# Altium PCB PCB1.PcbDoc (part 2 of 3)
Units mm, origin at the board's own origin, x right, y up, seen from the top; angles counter-clockwise.
Board outline 232.8 x 105.73 mm, 4 copper layers (Top Layer, Power Layer, GND Layer, Bottom Layer), stack 1.714 mm thick; 607 components, 390 nets, 1962 pads, 57 vias.
Unrouted connection lines stored in the file: 1386.
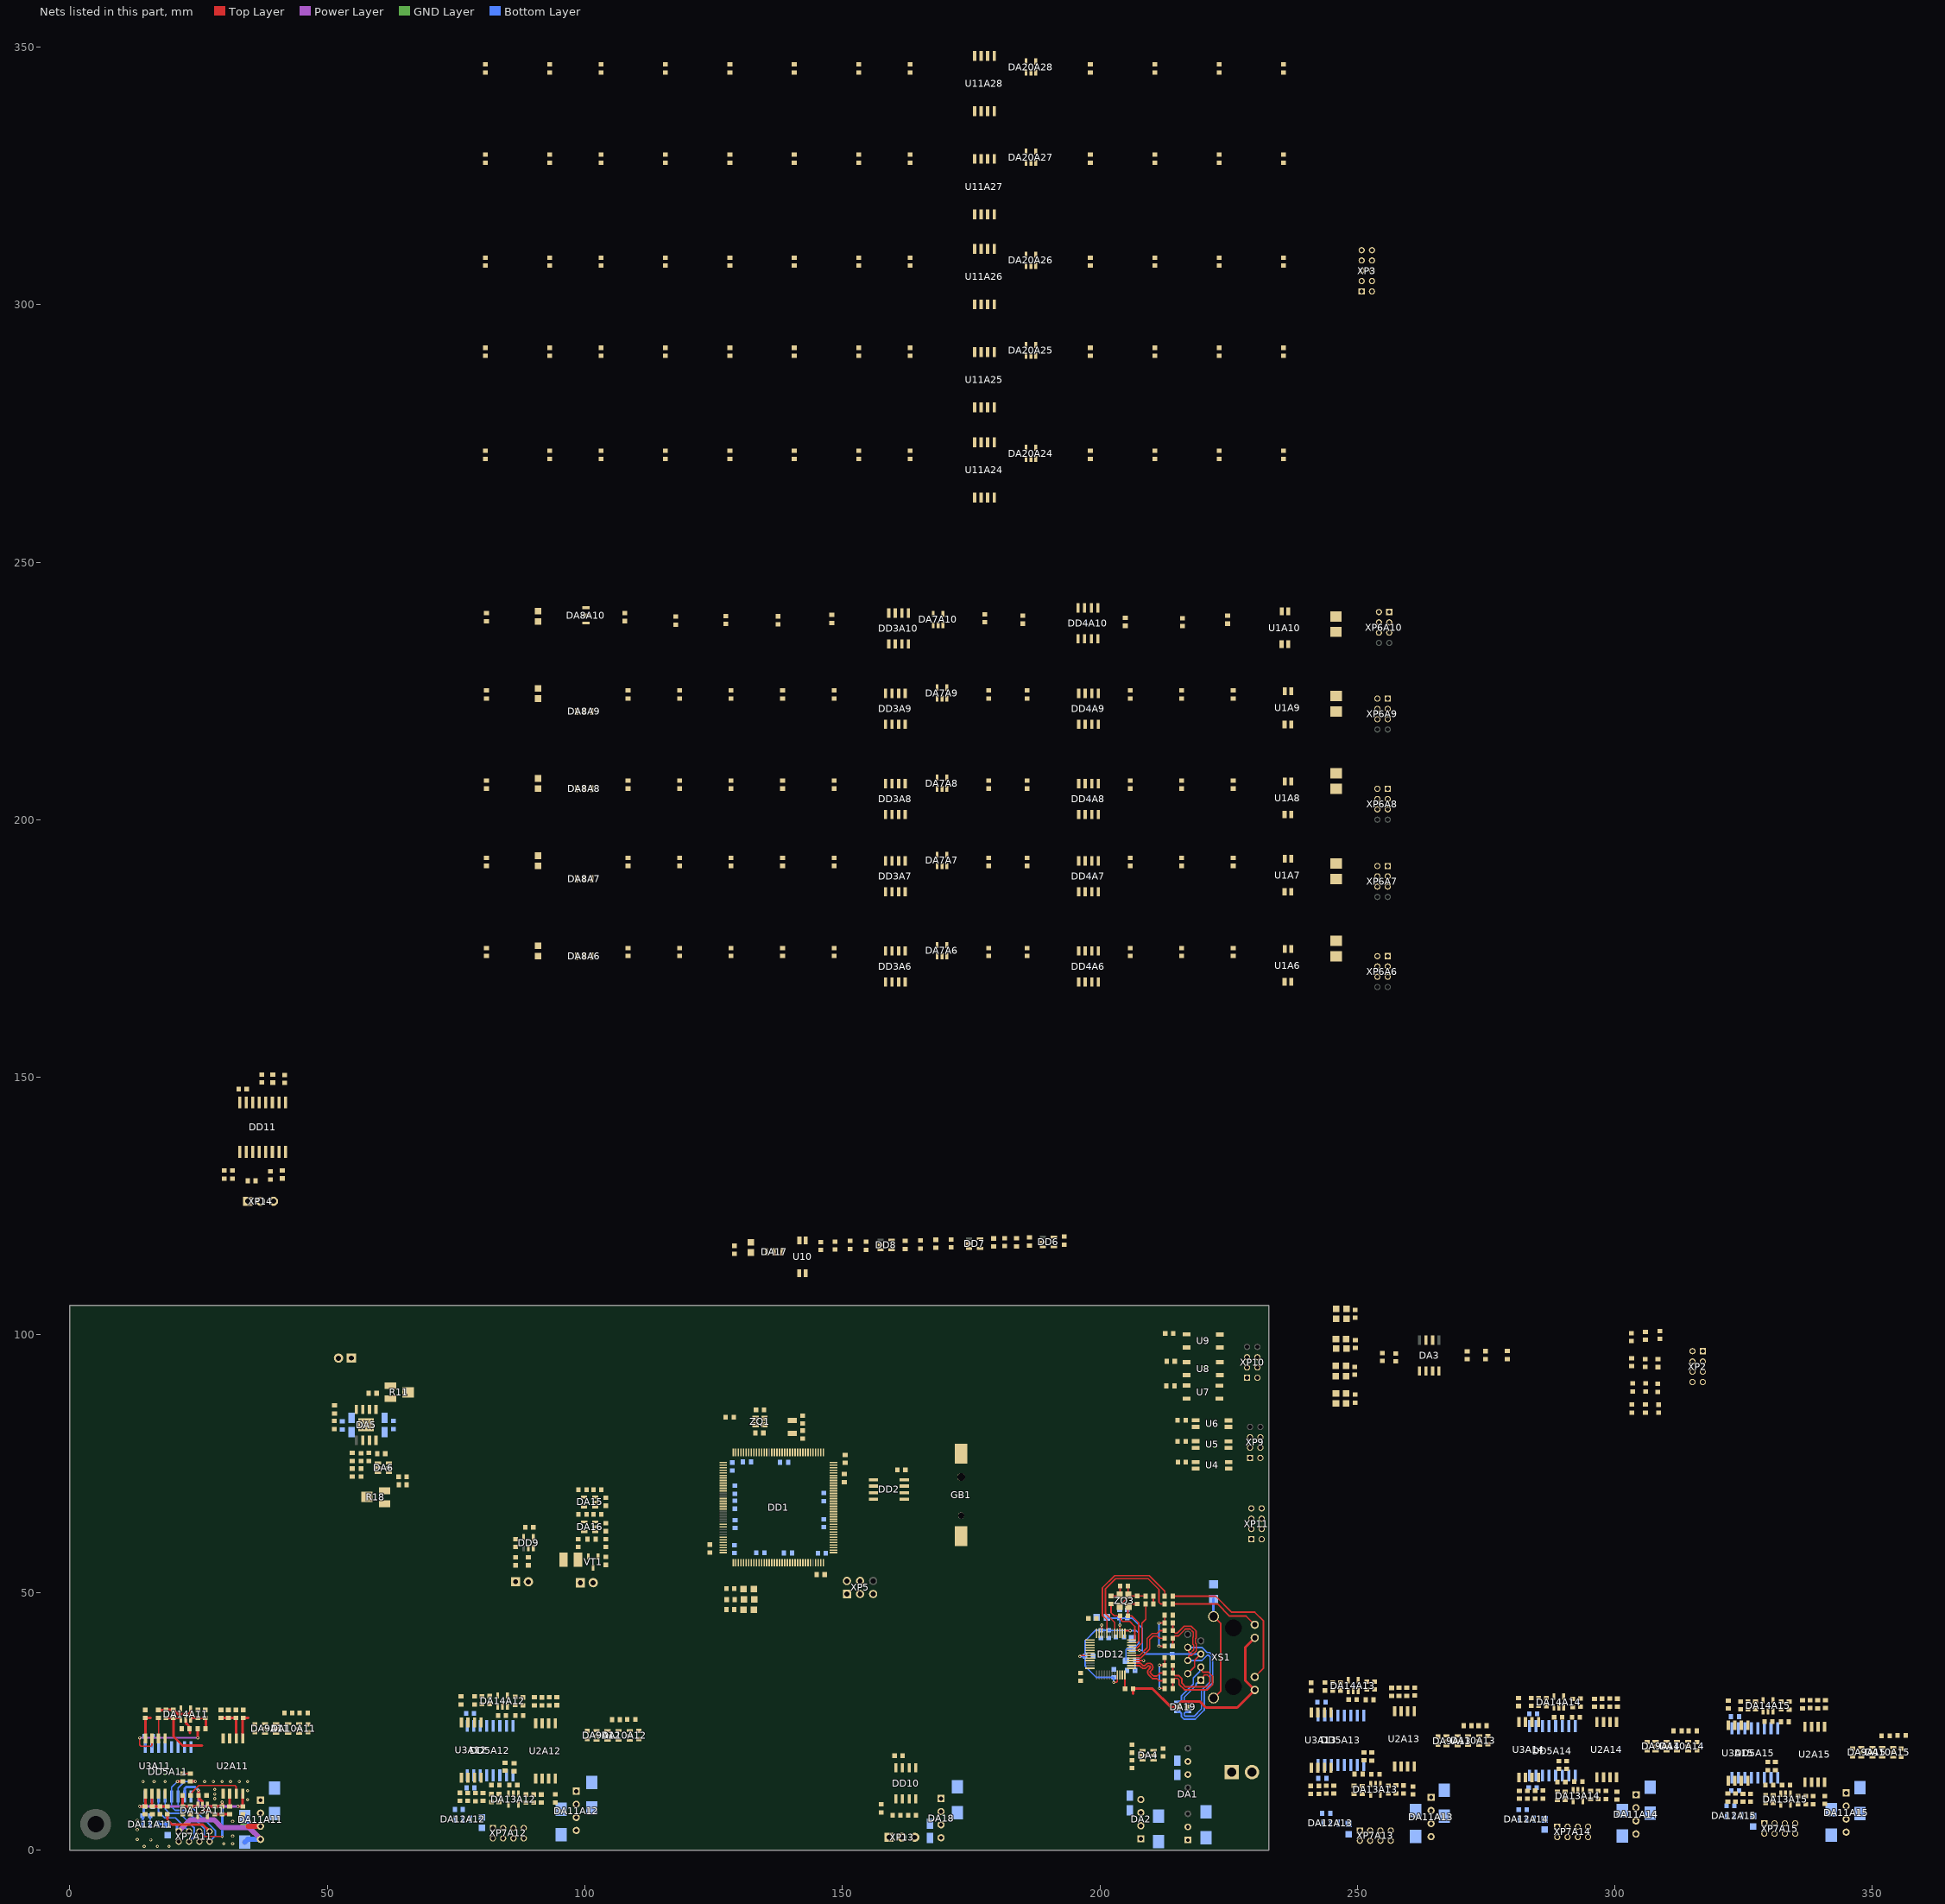
[diagram p4: the nets of this part, all layers, seen from the top]

## Footprints (in the part's own frame and the unit in brackets; to place one, negate y for a bottom-side part, rotate by r counter-clockwise, add the part's x,y. Pads: shape width x height; smd on the part's side, far side on the other; paste and mask are expansions set on the pad) (continued)
CAP_B [mm]
  rect 2x2.2 smd: 1(0,0) 2(3,0)
  silkscreen extent -2.15,-1.4 4.25,1.4, body extent -0.25,-1.4 3.25,1.4, height 1.9
CAP_C [mm]
  rect 2.6x2.2 smd: 1(0,0) 2(5,0)
  silkscreen extent -2.4,-1.58 6.53,1.6, body extent -0.5,-1.6 5.5,1.6, height 2.5
DS1092-12-N8S [mm]
  rect 3.9x2.4 smd: 1(0,0) 2(16,0)
  round 1.2 hole 1.2: 1(4,0)
  round 1.5 hole 1.5: 1(11.5,0)
  silkscreen extent 0,-7.37 17.4,7.37, body extent -1.4,-7.37 17.4,7.37, height 4.23
IND_0805 [mm]
  rect 1.27x1.27 smd: 1(0,0) 2(2,0)
  silkscreen extent -0.85,-0.85 2.85,0.85, body extent 0,-0.62 2,0.62, height 0.85
LED_0805 [mm]
  rect 1.27x1.27 smd: 1(0,0) 2(2,0)
  silkscreen extent -0.85,-0.85 3.22,0.85, body extent -0.03,-0.46 2.03,0.45, height 0.85
LPJD0012BENL [mm]
  rect 1.4x1.4 hole 0.9: 1(0,0)
  round 1.4 hole 0.9: 2(1.27,2.54) 3(2.54,0) 4(3.81,2.54) 5(5.08,0) 6(6.35,2.54) 7(7.62,0) 8(8.89,2.54)
  round 1.6 hole 1.02: 9(-1.907,-10.46) 10(0.633,-10.46) 11(8.223,-10.46) 12(10.763,-10.46)
  round 2.1 hole 1.6: 13(-3.475,-2.46) 14(12.365,-2.46)
  round 0 hole 3.25 unplated: ""(-1.27,-6.35) ""(10.16,-6.35)
  silkscreen extent -3.57,-13.08 12.42,3.62, body extent -3.57,-13.08 12.42,3.63, height 17.4
LQFP-48 [mm]
  rect 1.8x0.3 smd: 1(0,0) 2(0,-0.5) 3(0,-1) 4(0,-1.5) 5(0,-2) 6(0,-2.5) 7(0,-3) 8(0,-3.5) 9(0,-4) 10(0,-4.5) 11(0,-5) 12(0,-5.5) 25(8.1,-5.5) 26(8.1,-5) 27(8.1,-4.5) 28(8.1,-4) 29(8.1,-3.5) 30(8.1,-3) 31(8.1,-2.5) 32(8.1,-2) 33(8.1,-1.5) 34(8.1,-1) 35(8.1,-0.5) 36(8.1,0)
  rect 0.3x1.8 smd: 13(1.3,-6.8) 14(1.8,-6.8) 15(2.3,-6.8) 16(2.8,-6.8) 17(3.3,-6.8) 18(3.8,-6.8) 19(4.3,-6.8) 20(4.8,-6.8) 21(5.3,-6.8) 22(5.8,-6.8) 23(6.3,-6.8) 24(6.8,-6.8) 37(6.8,1.3) 38(6.3,1.3) 39(5.8,1.3) 40(5.3,1.3) 41(4.8,1.3) 42(4.3,1.3) 43(3.8,1.3) 44(3.3,1.3) 45(2.8,1.3) 46(2.3,1.3) 47(1.8,1.3) 48(1.3,1.3)
  silkscreen extent -0.13,-5.6 6.9,0.92, body extent -0.45,-7.25 8.55,1.75, height 1.6
LQFP-144 [mm]
  rect 1.45x0.3 smd: 1(0,0) 2(0,-0.5) 3(0,-1) 4(0,-1.5) 5(0,-2) 6(0,-2.5) 7(0,-3) 8(0,-3.5) 9(0,-4) 10(0,-4.5) 11(0,-5) 12(0,-5.5) 13(0,-6) 14(0,-6.5) 15(0,-7) 16(0,-7.5) 17(0,-8) 18(0,-8.5) 19(0,-9) 20(0,-9.5) 21(0,-10) 22(0,-10.5) 23(0,-11) 24(0,-11.5) 25(0,-12) 26(0,-12.5) 27(0,-13) 28(0,-13.5) 29(0,-14) 30(0,-14.5) 31(0,-15) 32(0,-15.5) 33(0,-16) 34(0,-16.5) 35(0,-17) 36(0,-17.5) 73(21.45,-17.5) 74(21.45,-17) 75(21.45,-16.5) 76(21.45,-16) 77(21.45,-15.5) 78(21.45,-15) 79(21.45,-14.5) 80(21.45,-14) 81(21.45,-13.5) 82(21.45,-13) 83(21.45,-12.5) 84(21.45,-12) 85(21.45,-11.5) 86(21.45,-11) 87(21.45,-10.5) 88(21.45,-10) 89(21.45,-9.5) 90(21.45,-9) 91(21.45,-8.5) 92(21.45,-8) 93(21.45,-7.5) 94(21.45,-7) 95(21.45,-6.5) 96(21.45,-6) 97(21.45,-5.5) 98(21.45,-5) 99(21.45,-4.5) 100(21.45,-4) 101(21.45,-3.5) 102(21.45,-3) 103(21.45,-2.5) 104(21.45,-2) 105(21.45,-1.5) 106(21.45,-1) 107(21.45,-0.5) 108(21.45,0)
  rect 0.3x1.45 smd: 37(1.975,-19.475) 38(2.475,-19.475) 39(2.975,-19.475) 40(3.475,-19.475) 41(3.975,-19.475) 42(4.475,-19.475) 43(4.975,-19.475) 44(5.475,-19.475) 45(5.975,-19.475) 46(6.475,-19.475) 47(6.975,-19.475) 48(7.475,-19.475) 49(7.975,-19.475) 50(8.475,-19.475) 51(8.975,-19.475) 52(9.475,-19.475) 53(9.975,-19.475) 54(10.475,-19.475) 55(10.975,-19.475) 56(11.475,-19.475) 57(11.975,-19.475) 58(12.475,-19.475) 59(12.975,-19.475) 60(13.475,-19.475) 61(13.975,-19.475) 62(14.475,-19.475) 63(14.975,-19.475) 64(15.475,-19.475) 65(15.975,-19.475) 66(16.475,-19.475) 67(16.975,-19.475) 68(17.475,-19.475) 69(17.975,-19.475) 70(18.475,-19.475) 71(18.975,-19.475) 72(19.475,-19.475) 109(19.475,1.975) 110(18.975,1.975) 111(18.475,1.975) 112(17.975,1.975) 113(17.475,1.975) 114(16.975,1.975) 115(16.475,1.975) 116(15.975,1.975) 117(15.475,1.975) 118(14.975,1.975) 119(14.475,1.975) 120(13.975,1.975) 121(13.475,1.975) 122(12.975,1.975) 123(12.475,1.975) 124(11.975,1.975) 125(11.475,1.975) 126(10.975,1.975) 127(10.475,1.975) 128(9.975,1.975) 129(9.475,1.975) 130(8.975,1.975) 131(8.475,1.975) 132(7.975,1.975) 133(7.475,1.975) 134(6.975,1.975) 135(6.475,1.975) 136(5.975,1.975) 137(5.475,1.975) 138(4.975,1.975) 139(4.475,1.975) 140(3.975,1.975) 141(3.475,1.975) 142(2.975,1.975) 143(2.475,1.975) 144(1.975,1.975)
  silkscreen extent -0.12,-18.35 20.33,0.85, body extent -0.28,-19.75 21.72,2.25, height 1.63
NX2520SA [mm]
  rect 1.2x1 smd: 1(0,0) 2(1.7,0) 3(1.7,1.3) 4(0,1.3)
  silkscreen extent -0.8,-0.7 2.5,2, body extent -0.4,-0.35 2.1,1.65, height 0.65
NX3215SA [mm]
  rect 1x1.8 smd: 1(0,0) 2(2.5,0)
  silkscreen extent -0.7,-1.1 3.2,1.1, body extent -0.35,-0.75 2.85,0.75, height 0.8
PLD-6 [mm]
  rect 1.6x1.6 hole 1: 1(0,0)
  round 1.6 hole 1: 2(0,2.54) 3(2.54,0) 4(2.54,2.54) 5(5.08,0) 6(5.08,2.54)
  silkscreen extent -1.27,-2.12 6.27,3.81, body extent -1.3,-1.2 6.32,3.8, height 8.5
RES_0603 [mm]
  rect 0.85x0.95 smd: 1(0.025,0) 2(1.575,0)
  silkscreen extent -0.58,-0.65 2.17,0.65, body extent -0.05,-0.48 1.65,0.48, height 0.6
RES_0805 [mm]
  rect 1.27x1.27 smd: 1(0,0) 2(2,0)
  silkscreen extent -0.85,-0.85 2.85,0.85, body extent 0,-0.62 2,0.62, height 0.6
RES_1210 [mm]
  rect 1.6x2.8 smd: 1(-0.025,0.025) 2(2.775,0.025)
  silkscreen extent -1.02,-1.58 3.77,1.63, body extent -0.15,-1.28 2.95,1.33, height 0.57
SOIC-8 [mm]
  rect 1.8x0.6 smd: 1(0,0) 2(0,-1.25) 3(0,-2.55) 4(0,-3.8) 5(6,-3.8) 6(6,-2.55) 7(6,-1.25) 8(6,0)
  silkscreen extent -0.12,-4.38 4.8,0.87, body extent -0.13,-4.37 6.08,0.63, height 1.75
"SOIC-8 EPAD" [mm]
  rect 1.8x0.6 smd: 1(0,0) 2(0,-1.25) 3(0,-2.55) 4(0,-3.8) 5(6,-3.8) 6(6,-2.55) 7(6,-1.25) 8(6,0)
  rect 2.5x3 smd: EPAD(3,-1.9)
  silkscreen extent -0.12,-4.38 4.8,0.88, body extent -0.13,-4.37 6.08,0.63, height 1.75
SOIC-16IC [mm]
  rect 2.3x0.6 smd: 1(0,0) 2(0,-1.27) 3(0,-2.54) 4(0,-3.81) 5(0,-5.08) 6(0,-6.35) 7(0,-7.62) 8(0,-8.89) 9(9.6,-8.89) 10(9.6,-7.62) 11(9.6,-6.35) 12(9.6,-5.08) 13(9.6,-3.81) 14(9.6,-2.54) 15(9.6,-1.27) 16(9.6,0)
  silkscreen extent -0.15,-10.9 8.03,2, body extent -0.38,-10.9 9.93,2, height 2.64
SOIC-16W [mm]
  rect 2.3x0.6 smd: 1(0,0) 2(0,-1.27) 3(0,-2.54) 4(0,-3.81) 5(0,-5.08) 6(0,-6.35) 7(0,-7.62) 8(0,-8.89) 9(9.6,-8.89) 10(9.6,-7.62) 11(9.6,-6.35) 12(9.6,-5.08) 13(9.6,-3.81) 14(9.6,-2.54) 15(9.6,-1.27) 16(9.6,0)
  silkscreen extent -0.15,-9.9 8.03,1, body extent -0.52,-9.7 10.11,0.8, height 2.62
SOT-23-3 [mm]
  rect 1.2x0.55 smd: 1(0,0) 2(0,-1.9) 3(2.15,-0.95)
  silkscreen extent -0.27,-2.5 2,0.65, body extent -0.15,-2.45 2.35,0.55, height 1
SOT-23-5 [mm]
  rect 1.2x0.55 smd: 1(0,0) 2(0,-0.95) 3(0,-1.9) 4(2.15,-1.9) 5(2.15,0)
  silkscreen extent -0.27,-2.5 1.97,0.65, body extent -0.15,-2.45 2.35,0.55, height 1.1
SOT-23-6 [mm]
  rect 1.2x0.55 smd: 1(0,0) 2(0,-0.95) 3(0,-1.9) 4(2.15,-1.9) 5(2.15,-0.95) 6(2.15,0)
  silkscreen extent -0.27,-2.5 1.97,0.65, body extent -0.3,-2.4 2.5,0.5, height 1.18
SOT-89 [mm]
  rect 0.57x1.4 smd: 1(0,0) 3(3,0)
  rect 0.65x1.4 smd: 2(1.5,0)
  Top Layer region: 1.825,0.7 2.5,1.375 2.5,3.825 0.5,3.825 0.5,1.375 1.175,0.7 1.175,-0.7 1.825,-0.7
  Top Layer lines w0.2: 1.5,-0.075 1.5,0
  silkscreen extent -0.82,-0.07 3.75,3, body extent -0.75,-0.43 3.75,3.57, height 1.5
SSO-8 [mm]
  rect 1.905x0.64 smd: 1(0,0) 2(0,-1.275) 3(0,-2.55) 4(0,-3.825) 5(10.75,-3.825) 6(10.75,-2.55) 7(10.75,-1.275) 8(10.75,0)
  silkscreen extent -0.12,-4.82 9,1.02, body extent -0.33,-4.82 11.18,1.03, height 3.61
"TME (SIP-4)" [mm]
  rect 1.4x1.4 hole 0.8: 1(0,0)
  round 1.4 hole 0.8: 2(2.54,0) 3(5.08,0) 4(7.62,0)
  silkscreen extent -1.9,-1.7 9.6,5.4, body extent -1.9,-1.7 9.6,5.4, height 10.2
"TMR3 (SIP-8)" [mm]
  rect 1.3x1.3 hole 0.7: 1(0,0)
  round 1.3 hole 0.7: 2(2.54,0) 3(5.08,0) 5(10.16,0) 6(12.7,0) 7(15.24,0) 8(17.78,0)
  silkscreen extent -2,-5.58 19.8,3.5, body extent -2,-5.6 19.8,3.5, height 11.2

## Part data
C1 C2 C3 C4 C37 C40 C54A6 C54A7 C54A8 C54A9 C54A10 C57A11 C57A12 C57A13 C57A14 C57A15 C59A11 C59A12 C59A13 C59A14 C59A15 C90 C93: library part Capacitor_Polar
  C1 C2 C57A11 C57A12 C57A13 C57A14 C57A15 C90: Model="TECAP, 10 мкФ, 35 В, тип C, 10%"
  C3 C4 C37 C40 C93: Model="TECAP, 10 мкФ, 10 В, тип A, 10%"
  C54A6 C54A7 C54A8 C54A9 C54A10 C59A11 C59A12 C59A13 C59A14 C59A15: Model="TECAP, 10 мкФ, 25 В, тип B, 10%"
C5 C6 C7 C8 C9 C10 C11 C13 C14 C15 C16 C17 C18 C20 C21 C22 C23 C24 C25 C26 C27 C28 C29 C30 C31 C32 C33 C34 C35 C36 C38 C39 C41 C42 C43 C44 C45A2 C45A3 C45A4 C45A5 C46A6 C46A7 C46A8 C46A9 C46A10 C47A6 C47A7 C47A8 C47A9 C47A10 C48A6 C48A7 C48A8 C48A9 C48A10 C49A6 C49A7 C49A8 C49A9 C49A10 C50A6 C50A7 C50A8 C50A9 C50A10 C51A6 C51A7 C51A8 C51A9 C51A10 C52A6 C52A7 C52A8 C52A9 C52A10 C53A6 C53A7 C53A8 C53A9 C53A10 C55A11 C55A12 C55A13 C55A14 C55A15 C56A11 C56A12 C56A13 C56A14 C56A15 C58A11 C58A12 C58A13 C58A14 C58A15 C60A11 C60A12 C60A13 C60A14 C60A15 C61A11 C61A12 C61A13 C61A14 C61A15 C62A11 C62A12 C62A13 C62A14 C62A15 C63A11 C63A12 C63A13 C63A14 C63A15 C64A11 C64A12 C64A13 C64A14 C64A15 C65A11 C65A12 C65A13 C65A14 C65A15 C66A11 C66A12 C66A13 C66A14 C66A15 C67A11 C67A12 C67A13 C67A14 C67A15 C68A11 C68A12 C68A13 C68A14 C68A15 C69A11 C69A12 C69A13 C69A14 C69A15 C70A11 C70A12 C70A13 C70A14 C70A15 C71A11 C71A12 C71A13 C71A14 C71A15 C72A11 C72A12 C72A13 C72A14 C72A15 C73A11 C73A12 C73A13 C73A14 C73A15 C74A11 C74A12 C74A13 C74A14 C74A15 C75A11 C75A12 C75A13 C75A14 C75A15 C76 C77 C78 C79 C80 C81 C82 C83 C84 C85 C86 C87 C88 C89 C91 C92 C94 C95 C96 C97 C98 C99 C100 C101 C102 C103 C105 C106 C107 C108 C110 C112 C113 C114 C115 C116 C117 C118 C119 C120A24 C120A25 C120A26 C120A27 C120A28 C121A24 C121A25 C121A26 C121A27 C121A28 C122A24 C122A25 C122A26 C122A27 C122A28 C123A24 C123A25 C123A26 C123A27 C123A28 C124A24 C124A25 C124A26 C124A27 C124A28 C125A24 C125A25 C125A26 C125A27 C125A28: library part Capacitor, Manufacturer=Murata
  C5 C6 C7 C10 C14 C16 C17 C18 C21 C23 C24 C25 C26 C27 C28 C29 C30 C32 C33 C34 C35 C38 C39 C41 C43 C45A2 C45A3 C45A4 C45A5 C46A6 C46A7 C46A8 C46A9 C46A10 C47A6 C47A7 C47A8 C47A9 C47A10 C48A6 C48A7 C48A8 C48A9 C48A10 C49A6 C49A7 C49A8 C49A9 C49A10 C52A6 C52A7 C52A8 C52A9 C52A10 C53A6 C53A7 C53A8 C53A9 C53A10 C56A11 C56A12 C56A13 C56A14 C56A15 C58A11 C58A12 C58A13 C58A14 C58A15 C60A11 C60A12 C60A13 C60A14 C60A15 C61A11 C61A12 C61A13 C61A14 C61A15 C64A11 C64A12 C64A13 C64A14 C64A15 C66A11 C66A12 C66A13 C66A14 C66A15 C67A11 C67A12 C67A13 C67A14 C67A15 C68A11 C68A12 C68A13 C68A14 C68A15 C71A11 C71A12 C71A13 C71A14 C71A15 C72A11 C72A12 C72A13 C72A14 C72A15 C73A11 C73A12 C73A13 C73A14 C73A15 C77 C78 C81 C85 C86 C87 C89 C91 C92 C94 C95 C97 C100 C101 C103 C105 C106 C107 C108 C110 C112 C113 C114 C115 C116 C117 C118 C119 C120A24 C120A25 C120A26 C120A27 C120A28 C122A24 C122A25 C122A26 C122A27 C122A28 C124A24 C124A25 C124A26 C124A27 C124A28: Model=GRM188R71H104KA93D
  C8 C11 C15 C96 C102: Model=GRM188R61E106KA73D
  C9 C50A6 C50A7 C50A8 C50A9 C50A10 C76 C82 C83 C84 C88: Model=GRM188R61H105KAALD
  C13 C20: Model=GRM1885C1H180FA01D
  C22 C31 C44: Model=GRM188R61H225KE11D
  C36 C42: Model=GRM1885C1H220JA01D
  C51A6 C51A7 C51A8 C51A9 C51A10 C65A11 C65A12 C65A13 C65A14 C65A15 C80: Model=GRM219R71H334KA88D
  C55A11 C55A12 C55A13 C55A14 C55A15: Model=GRM188R71H103JA01D
  C62A11 C62A12 C62A13 C62A14 C62A15 C63A11 C63A12 C63A13 C63A14 C63A15 C69A11 C69A12 C69A13 C69A14 C69A15 C70A11 C70A12 C70A13 C70A14 C70A15 C74A11 C74A12 C74A13 C74A14 C74A15 C75A11 C75A12 C75A13 C75A14 C75A15 C79 C121A24 C121A25 C121A26 C121A27 C121A28 C123A24 C123A25 C123A26 C123A27 C123A28 C125A24 C125A25 C125A26 C125A27 C125A28: Model=GRM1885C1H101JA01D
  C98 C99: Model=GRM188R71H103KA01D
C12 C19 C104 C109 C111: library part Capacitor, Manufacturer=Yageo
  C12 C19 C109 C111: Model=CC0603CRNPO9BN8R0
  C104: Model=CC1206KKX7RDBB102
DA1: library part TMR3, Manufacturer="Traco Power", Model="TMR 6-2411"
DA2 DA11A11 DA11A12 DA11A13 DA11A14 DA11A15 DA18: library part TME, Manufacturer="Traco Power"
  DA2 DA18: Model="TME 2405S"
  DA11A11 DA11A12 DA11A13 DA11A14 DA11A15: Model="TME 2412S"
DA3: library part LD1117D33, Manufacturer=STMicroelectronics, Model=LD1117D33CTR
DA4: Manufacturer="Texas Instruments", Model=LM2776DBVR
DA5 DD11: Manufacturer="Analog Devices"
  DA5: Model=ADA4817-1ARDZ
  DD11: Model=ADM2682EBRIZ
DA6: library part TLV3501, Manufacturer="Texas Instruments", Model=TLV3501AIDBVR
DA7A6 DA7A7 DA7A8 DA7A9 DA7A10 DA10A11 DA10A12 DA10A13 DA10A14 DA10A15 DA13A11 DA13A12 DA13A13 DA13A14 DA13A15 DA14A11 DA14A12 DA14A13 DA14A14 DA14A15 DA15 DA16 DA20A24 DA20A25 DA20A26 DA20A27 DA20A28: library part LMC7101, Manufacturer="Texas Instruments", Model=LMC7101BIM5
DA8A6 DA8A7 DA8A8 DA8A9 DA8A10 DA12A11 DA12A12 DA12A13 DA12A14 DA12A15 DA17: library part LD2981ABU50TR, Manufacturer=STMicroelectronics
  DA8A6 DA8A7 DA8A8 DA8A9 DA8A10 DA12A11 DA12A12 DA12A13 DA12A14 DA12A15: Model=L78L05ABUTR
  DA17: Model=L78L12ABUTR
DA9A11 DA9A12 DA9A13 DA9A14 DA9A15: library part SN74LVC1G3157, Manufacturer="Texas Instruments", Model=SN74LVC1G3157DBV
DA19: library part TPD4S009, Manufacturer="Texas Instruments", Model=TPD4S009DBVR
DD1: library part STM32F405ZG, Manufacturer=STMicroelectronics, Model=STM32F405ZGT6
DD2: library part W25Q, Manufacturer=Winbond, Model=W25Q16JVSNIQ
DD3A6 DD3A7 DD3A8 DD3A9 DD3A10 DD10: library part ADUM1100, Manufacturer="Analog Devices", Model=ADUM1100BR
DD4A6 DD4A7 DD4A8 DD4A9 DD4A10: library part ADUM1200, Manufacturer="Analog Devices", Model=ADUM1200CR
DD5A11 DD5A12 DD5A13 DD5A14 DD5A15: library part ADUM1402, Manufacturer="Analog Devices", Model=ADUM1402CRW
DD6 DD7 DD8 DD9: library part SN74LVC1G17, Manufacturer="Texas Instruments", Model=SN74LVC1G17DBV
DD12: library part W5100S, Manufacturer=Wiznet, Model=W5100S-L
GB1: library part Accumulator, Manufacturer=Connfly, Model=DS1092-12-N8S
L1 L2 L3 L4 L5 L6 L7: library part Inductor, Manufacturer=Murata, Model=BLM21PG221SN1D
R1 R2 R3 R4 R5 R6 R7 R8 R9 R10 R12 R14 R15 R16 R17 R19A2 R19A3 R19A4 R19A5 R20A2 R20A3 R20A4 R20A5 R21A6 R21A7 R21A8 R21A9 R21A10 R22A6 R22A7 R22A8 R22A9 R22A10 R23A6 R23A7 R23A8 R23A9 R23A10 R24A6 R24A7 R24A8 R24A9 R24A10 R25A11 R25A12 R25A13 R25A14 R25A15 R26A11 R26A12 R26A13 R26A14 R26A15 R27A11 R27A12 R27A13 R27A14 R27A15 R28A11 R28A12 R28A13 R28A14 R28A15 R29A11 R29A12 R29A13 R29A14 R29A15 R30A11 R30A12 R30A13 R30A14 R30A15 R31A11 R31A12 R31A13 R31A14 R31A15 R32A11 R32A12 R32A13 R32A14 R32A15 R33A11 R33A12 R33A13 R33A14 R33A15 R34A11 R34A12 R34A13 R34A14 R34A15 R35A11 R35A12 R35A13 R35A14 R35A15 R36A11 R36A12 R36A13 R36A14 R36A15 R37A11 R37A12 R37A13 R37A14 R37A15 R38A11 R38A12 R38A13 R38A14 R38A15 R39A11 R39A12 R39A13 R39A14 R39A15 R40 R41 R42 R43 R44 R45 R46 R47 R48 R49 R50 R51 R52 R53 R54 R55 R56 R57 R58 R59 R60 R61 R62 R63 R64 R65 R66 R67 R68 R69 R70 R71 R72 R73 R74 R75 R76 R77 R78 R79A24 R79A25 R79A26 R79A27 R79A28 R80A24 R80A25 R80A26 R80A27 R80A28 R81A24 R81A25 R81A26 R81A27 R81A28 R82A24 R82A25 R82A26 R82A27 R82A28 R83A24 R83A25 R83A26 R83A27 R83A28 R84A24 R84A25 R84A26 R84A27 R84A28: library part Resistor, Manufacturer=Yageo
  R1 R2 R3 R4: Model=RC0805FR-070RL
  R5 R9 R15 R16 R17 R19A2 R19A3 R19A4 R19A5 R20A2 R20A3 R20A4 R20A5 R22A6 R22A7 R22A8 R22A9 R22A10 R23A6 R23A7 R23A8 R23A9 R23A10 R24A6 R24A7 R24A8 R24A9 R24A10 R25A11 R25A12 R25A13 R25A14 R25A15 R28A11 R28A12 R28A13 R28A14 R28A15 R29A11 R29A12 R29A13 R29A14 R29A15 R30A11 R30A12 R30A13 R30A14 R30A15 R31A11 R31A12 R31A13 R31A14 R31A15 R32A11 R32A12 R32A13 R32A14 R32A15 R33A11 R33A12 R33A13 R33A14 R33A15 R36A11 R36A12 R36A13 R36A14 R36A15 R37A11 R37A12 R37A13 R37A14 R37A15 R40 R42 R44 R45 R56 R57 R58 R61 R62 R78 R80A24 R80A25 R80A26 R80A27 R80A28 R81A24 R81A25 R81A26 R81A27 R81A28 R82A24 R82A25 R82A26 R82A27 R82A28: Model=RC0603FR-0710KL
  R6 R7 R8 R21A6 R21A7 R21A8 R21A9 R21A10 R43 R47 R48 R49 R50 R51 R52 R59: Model=RC0603FR-07200RL
  R10 R12 R77: Model=RC0603FR-070RL
  R14: Model=RC0603FR-075K1L
  R26A11 R26A12 R26A13 R26A14 R26A15: Model=RC0603FR-076K49L
  R27A11 R27A12 R27A13 R27A14 R27A15 R79A24 R79A25 R79A26 R79A27 R79A28: Model=RC0603FR-0715KL
  R34A11 R34A12 R34A13 R34A14 R34A15 R38A11 R38A12 R38A13 R38A14 R38A15: Model=RC0603FR-0724K9L
  R35A11 R35A12 R35A13 R35A14 R35A15 R39A11 R39A12 R39A13 R39A14 R39A15 R83A24 R83A25 R83A26 R83A27 R83A28 R84A24 R84A25 R84A26 R84A27 R84A28: Model=RC0603FR-0716K5L
  R41 R76: Model=RC0603FR-0712KL
  R46: Model=RC1210FR-0710RL
  R53 R54 R55 R60 R70 R73: Model=RC0603FR-071KL
  R63: Model=RC0603FR-07120RL
  R64 R65 R66 R67: Model=RC0603FR-0749R9L
  R68 R69 R71 R72: Model=RC0603FR-073R3L
  R74: Model=RC0603FR-07300RL
  R75: Model=RC0603FR-071ML
R11 R18: library part Resistor_Variable, Manufacturer=Bourns
  R11: Model=3224W-1-105
  R18: Model=3224W-1-103
R13: library part Resistor
U1A6 U1A7 U1A8 U1A9 U1A10 U4 U5 U6 U10: library part TLP291, Manufacturer=Toshiba, Model=TLP291(GB-TP,SE
U2A11 U2A12 U2A13 U2A14 U2A15 U3A11 U3A12 U3A13 U3A14 U3A15 U11A24 U11A25 U11A26 U11A27 U11A28: library part ACPL-C87, Manufacturer=Broadcom, Model=ACPL-C87A-500E
U7 U8 U9: Manufacturer=Toshiba, Model=TLP127
VD1 VD2 VD3: library part LED, Manufacturer=Kingbright
  VD1: Model=KP-2012MGC
  VD2: Model=KP-2012SYC
  VD3: Model=KP-2012EC
VT1: library part "MOSFET N-channel", Manufacturer=UMW, Model=AO3400A
XP1 XP4 XP8 XP12: library part Connector-2, Manufacturer=JST
  XP1 XP8 XP12: Model=B2B-EH-A
  XP4: Model=B2P-VH
XP2 XP6A6 XP6A7 XP6A8 XP6A9 XP6A10 XP7A11 XP7A12 XP7A13 XP7A14 XP7A15 XP9 XP10 XP11: library part Connector-8, Manufacturer=JST, Model=B8B-PHDSS
XP3: library part Connector-10, Manufacturer=JST, Model=B10B-PHDSS
XP5: library part Connector-6, Manufacturer=Connfly, Model=PLD-6
XP13 XP14: library part Connector-3, Manufacturer=JST, Model=B3B-EH-A
XS1: Manufacturer=LINK-PP, Model=LPJD0012BENL
ZQ1: library part Quartz_Resonator_4-pin, Manufacturer=NDK, Model=NX2520SA-16MHZ-STD-CSW-5
ZQ2: library part Quartz_Resonator, Manufacturer=NDK, Model="NX3215SA- 32.768K-STD-MUA-8"
ZQ3: library part Quartz_Resonator_4-pin, Manufacturer=TXC, Model=7M-25.000MAAJ-T

## Free pads (board coordinates)
  round 6 hole 3.2: ""(5,5)

## Via types
v1: diameter 0.6, hole 0.3, Top Layer to Bottom Layer, tented both sides, 44 vias
v2: diameter 0.6, hole 0.3, Top Layer to Bottom Layer, 12 vias
v3: diameter 0.5, hole 0.2, Top Layer to Bottom Layer, tented both sides, 1 vias

## Nets (pads, with @x,y where several pads share a name; then routed paths per layer and width w, separated by ;. In a path a pad name is that pad's centre, name@x,y a point inside that pad or via, vN(x,y) a via of type N, cw(c..) or ccw(c..) an arc to the next point about the centre after c; other vN are vias at no path point)
1V2A: C113.1 DD12.4 L6.2 | length 5.7
  Top Layer w0.3: DD12.4@206.163,36.772 v1(208.463,36.771)
  Bottom Layer w0.3: C113.1@206.813,34.872 206.813,36.521 L6.2@207.063,36.772 v1(208.463,36.771)
1V2D: C112.1 C116.1 C118.1 C119.1 DD12.13 DD12.22 DD12.31 DD12.45 L5.2 L6.1 | length 40.1
  Top Layer w0.3: v1(196.072,37.571) 196.272,37.771 DD12.31@198.063,37.772 ; DD12.22@200.363,42.072 200.363,42.871 v1(200.363,43.671) ; v1(202.684,32.571) 202.702,32.553 203.188,32.553 203.363,32.729 DD12.45@203.363,33.972 ; DD12.13@204.863,42.072 204.863,42.571 v1(205.863,42.571)
  Bottom Layer w0.3: v1(196.072,37.571) 197.083,37.571 C116.1@197.133,37.622 ; C119.1@200.363,42.681 C118.1@201.713,42.682 201.768,42.626 205.809,42.626 v1(205.863,42.571) 207.069,42.571 207.528,42.112 207.528,40.083 207.002,39.556 206.748,39.556 206.263,39.071 205.239,39.071 205.063,38.896 L6.1@205.063,36.772 ; v1(200.363,43.671) 200.363,42.831 C119.1@200.213,42.682 199.173,42.681 197.133,40.641 197.133,37.771 C116.1@197.133,37.622 ; v1(202.684,32.571) C112.1@202.684,33.522 ; C112.1@202.713,33.522 199.263,33.522 197.133,35.651 C116.1@197.133,37.622
1V2O: C108.1 DD12.14 L5.1
+3.3V: C10.1 C11.1 C16.2 C23.2 C24.1 C25.1 C26.1 C28.2 C29.2 C30.2 C32.1 C33.2 C34.1 C35.1 C46A6.1 C46A7.1 C46A8.1 C46A9.1 C46A10.1 C47A6.1 C47A7.1 C47A8.1 C47A9.1 C47A10.1 C56A11.1 C56A12.1 C56A13.1 C56A14.1 C56A15.1 C64A11.1 C64A12.1 C64A13.1 C64A14.1 C64A15.1 C85.1 C86.1 C87.1 C89.1 C94.1 C95.1 C96.1 C97.1 C98.2 C105.1 C110.1 C115.1 DA3.2 DA3.3 DA3.6 DA3.7 DA10A11.2 DA10A12.2 DA10A13.2 DA10A14.2 DA10A15.2 DA19.5 DD1.17 DD1.30 DD1.39 DD1.52 DD1.62 DD1.72 DD1.84 DD1.95 DD1.108 DD1.121 DD1.131 DD1.144 DD2.3 DD2.7 DD2.8 DD3A6.1 DD3A6.3 DD3A7.1 DD3A7.3 DD3A8.1 DD3A8.3 DD3A9.1 DD3A9.3 DD3A10.1 DD3A10.3 DD4A6.8 DD4A7.8 DD4A8.8 DD4A9.8 DD4A10.8 DD5A11.1 DD5A11.7 DD5A12.1 DD5A12.7 DD5A13.1 DD5A13.7 DD5A14.1 DD5A14.7 DD5A15.1 DD5A15.7 DD6.5 DD7.5 DD8.5 DD9.5 DD10.8 DD11.2 DD11.7 DD12.24 DD12.36 L3.1 L7.1 R10.2 R56.2 R57.2 R58.2 R61.2 R78.2 XP5.1 XS1.9 XS1.11 | length 42.6
  Top Layer w0.5: 206.463,30.346 206.451,30.359 206.451,31.309 R78.2@206.438,31.322 210.213,31.321 213.763,27.771 215.338,27.771 215.363,27.796 215.538,27.972 215.538,28.578 215.831,28.871 219.375,28.871 220.575,27.671 226.663,27.671 XS1.9@230.063,31.071 228.263,32.871 228.263,39.401 XS1.11@230.063,41.201
  Bottom Layer w0.3: C64A11.1@14.525,22.1 14.655,21.97 DD5A11.1@14.655,20
+3.3VA: C14.2 C17.2 C18.1 C43.1 C44.1 C58A11.1 C58A12.1 C58A13.1 C58A14.1 C58A15.1 DA6.4 DA9A11.5 DA9A12.5 DA9A13.5 DA9A14.5 DA9A15.5 DD1.32 DD1.33 L3.2 R18.3 R19A2.1 R19A3.1 R19A4.1 R19A5.1
+3.3VA_ETH: C103.1 C114.1 C117.1 DD12.8 DD12.15 L7.2 XS1.2 XS1.5 | length 33.6
  Top Layer w0.3: DD12.15@203.863,42.072 v1(203.863,43.671) ; DD12.8@206.163,38.771 207.661,38.771 v1(207.679,38.753) ; XS1.2@217.063,34.249 218.363,35.549 218.363,36.819 XS1.5@219.603,38.059
  Bottom Layer w0.3: L7.2@201.363,45.172 201.513,45.021 C114.1@203.838,45.022 ; v1(203.863,43.671) 203.863,44.996 C114.1@203.838,45.022 ; v1(207.679,38.753) 208.245,38.753 ; XS1.5@219.603,38.059 C103.1@214.042,38.059 208.876,38.059 208.245,38.69 208.245,43.005 206.229,45.021 C117.1@205.305,45.022 C114.1@203.838,45.022
+5V: C3.1 C7.2 C8.1 C77.1 C78.1 DA1.6 DA3.4 DA4.3 DA4.4 DA15.2 DA16.2 L1.1 XP8.1
+5V_DRVA11: C61A11.1 C66A11.1 C68A11.1 C71A11.1 C72A11.1 DA12A11.1 DA13A11.2 DD5A11.10 DD5A11.16 U2A11.8 U3A11.1 | length 43.5
  Top Layer w0.5: v1(13.51,8.475) 14.55,8.475 14.66,8.585 U3A11.1@14.66,10.925 ; v1(24.95,11.6) 24.95,10.525 25.125,10.35 25.125,10.008 25.7,9.433 25.7,8.785 DA13A11.2@25.725,8.76 ; v1(32.625,8.475) 32.638,8.488 33.537,8.488 33.55,8.5 U2A11.8@33.55,10.925
  Power Layer w0.5: v1(13.51,8.475) 24.95,8.475 ; v1(24.95,11.6) 24.95,8.475 ; v1(32.625,8.475) 24.95,8.475
  Bottom Layer w0.5: v1(13.51,8.475) 14.35,8.475 14.59,8.475 14.665,8.55 DD5A11.16@14.665,10.4 ; C71A11.1@14.175,6.675 14.35,6.85 14.35,7.193 14.35,8.25 C68A11.1@14.525,8.425 ; DA12A11.1@14.2,5.025 C71A11.1@14.2,6.65 ; DD5A11.10@22.285,10.4 22.285,11.957 22.578,12.25 24.273,12.25 24.923,11.6 v1(24.95,11.6)
+5V_DRVA12: C61A12.1 C66A12.1 C68A12.1 C71A12.1 C72A12.1 DA12A12.1 DA13A12.2 DD5A12.10 DD5A12.16 U2A12.8 U3A12.1
+5V_DRVA13: C61A13.1 C66A13.1 C68A13.1 C71A13.1 C72A13.1 DA12A13.1 DA13A13.2 DD5A13.10 DD5A13.16 U2A13.8 U3A13.1
+5V_DRVA14: C61A14.1 C66A14.1 C68A14.1 C71A14.1 C72A14.1 DA12A14.1 DA13A14.2 DD5A14.10 DD5A14.16 U2A14.8 U3A14.1
+5V_DRVA15: C61A15.1 C66A15.1 C68A15.1 C71A15.1 C72A15.1 DA12A15.1 DA13A15.2 DD5A15.10 DD5A15.16 U2A15.8 U3A15.1
+5V_FS: C91.1 C92.1 C93.1 DA18.4 DD10.1 DD10.3 XP13.2
+5V_PSA6: C48A6.1 C49A6.1 C52A6.1 C53A6.1 DA7A6.2 DA8A6.1 DD3A6.8 DD4A6.1 R23A6.1 R24A6.1
+5V_PSA7: C48A7.1 C49A7.1 C52A7.1 C53A7.1 DA7A7.2 DA8A7.1 DD3A7.8 DD4A7.1 R23A7.1 R24A7.1
+5V_PSA8: C48A8.1 C49A8.1 C52A8.1 C53A8.1 DA7A8.2 DA8A8.1 DD3A8.8 DD4A8.1 R23A8.1 R24A8.1
+5V_PSA9: C48A9.1 C49A9.1 C52A9.1 C53A9.1 DA7A9.2 DA8A9.1 DD3A9.8 DD4A9.1 R23A9.1 R24A9.1
+5V_PSA10: C48A10.1 C49A10.1 C52A10.1 C53A10.1 DA7A10.2 DA8A10.1 DD3A10.8 DD4A10.1 R23A10.1 R24A10.1
+5VA: C5.1 C39.1 C40.1 C60A11.1 C60A12.1 C60A13.1 C60A14.1 C60A15.1 C67A11.1 C67A12.1 C67A13.1 C67A14.1 C67A15.1 C73A11.1 C73A12.1 C73A13.1 C73A14.1 C73A15.1 C122A24.1 C122A25.1 C122A26.1 C122A27.1 C122A28.1 C124A24.1 C124A25.1 C124A26.1 C124A27.1 C124A28.1 DA5.7 DA5.8 DA14A11.2 DA14A12.2 DA14A13.2 DA14A14.2 DA14A15.2 DA20A24.2 DA20A25.2 DA20A26.2 DA20A27.2 DA20A28.2 L1.2 U2A11.1 U2A12.1 U2A13.1 U2A14.1 U2A15.1 U3A11.8 U3A12.8 U3A13.8 U3A14.8 U3A15.8 U11A24.8 U11A25.8 U11A26.8 U11A27.8 U11A28.8 | length 13
  Top Layer w0.5: U3A11.8@14.66,21.675 C67A11.1@14.66,25.625 ; C67A11.1@14.673,25.638 14.679,25.631 15.669,25.631 15.675,25.625 ; DA14A11.2@22.5,25.325 22.525,25.3 22.525,24.675 23.125,24.075 23.125,23.725 23.3,23.55 23.3,22.675 ; U2A11.1@33.55,21.675 33.55,25.552 C60A11.1@33.635,25.638 ; C60A11.1@33.625,25.65 33.637,25.638 34.637,25.638 34.65,25.625
+5VA_CS: C6.1 C120A24.1 C120A25.1 C120A26.1 C120A27.1 C120A28.1 L2.2 U11A24.1 U11A25.1 U11A26.1 U11A27.1 U11A28.1
+12V: C81.1 DA17.1 XP11.7
+12V_DRVA11: C59A11.1 C65A11.2 DA11A11.4 DA12A11.3 XP7A11.1 | length 26.6
  Power Layer w1: XP7A11.1@21.125,3.625 23.363,5.863 28.011,5.863 29.533,4.342 34.835,4.342 DA11A11.4@37.038,2.138
  Bottom Layer w0.5: DA12A11.3@17.2,5.025 19.15,5.025 20.433,5.025 20.775,4.683 20.775,3.975 XP7A11.1@21.125,3.625
  Bottom Layer w1: C59A11.1@33.975,1.525 34.525,2.075 DA11A11.4@37,2.075
+12V_DRVA12: C59A12.1 C65A12.2 DA11A12.4 DA12A12.3 XP7A12.1
+12V_DRVA13: C59A13.1 C65A13.2 DA11A13.4 DA12A13.3 XP7A13.1
+12V_DRVA14: C59A14.1 C65A14.2 DA11A14.4 DA12A14.3 XP7A14.1
+12V_DRVA15: C59A15.1 C65A15.2 DA11A15.4 DA12A15.3 XP7A15.1
+12V_PSA6: C51A6.2 C54A6.1 DA8A6.3 U1A6.4 XP6A6.1
+12V_PSA7: C51A7.2 C54A7.1 DA8A7.3 U1A7.4 XP6A7.1
+12V_PSA8: C51A8.2 C54A8.1 DA8A8.3 U1A8.4 XP6A8.1
+12V_PSA9: C51A9.2 C54A9.1 DA8A9.3 U1A9.4 XP6A9.1
+12V_PSA10: C51A10.2 C54A10.1 DA8A10.3 U1A10.4 XP6A10.1
+24V: C1.1 C2.1 C57A11.1 C57A12.1 C57A13.1 C57A14.1 C57A15.1 C80.2 C90.1 DA1.2 DA2.2 DA11A11.2 DA11A12.2 DA11A13.2 DA11A14.2 DA11A15.2 DA17.3 DA18.2 XP4.1 XP9.1 XP9.3 XP9.5 XP10.1 XP10.3 XP10.5
+VBAT: DD1.6 GB1.2
-5V: C15.1 DA4.1 L4.1
-5VA: C21.1 C37.2 C38.1 DA5.4 L4.2 R12.1
ACTn: DD12.20 R70.2 | length 24.5
  Top Layer w0.3: DD12.20@201.363,42.072 201.363,44.671 200.463,45.571 200.463,50.871 202.863,53.271 209.563,53.271 212.588,50.246 R70.2@212.588,49.284
AGND: C5.2 C14.1 C17.1 C18.2 C21.2 C37.1 C38.2 C39.2 C40.2 C41.2 C42.2 C43.2 C44.2 C45A2.2 C45A3.2 C45A4.2 C45A5.2 C58A11.2 C58A12.2 C58A13.2 C58A14.2 C58A15.2 C60A11.2 C60A12.2 C60A13.2 C60A14.2 C60A15.2 C62A11.1 C62A12.1 C62A13.1 C62A14.1 C62A15.1 C67A11.2 C67A12.2 C67A13.2 C67A14.2 C67A15.2 C70A11.2 C70A12.2 C70A13.2 C70A14.2 C70A15.2 C73A11.2 C73A12.2 C73A13.2 C73A14.2 C73A15.2 C122A24.2 C122A25.2 C122A26.2 C122A27.2 C122A28.2 C123A24.2 C123A25.2 C123A26.2 C123A27.2 C123A28.2 C124A24.2 C124A25.2 C124A26.2 C124A27.2 C124A28.2 DA5.3 DA5.EPAD DA6.2 DA6.6 DA9A11.2 DA9A12.2 DA9A13.2 DA9A14.2 DA9A15.2 DA14A11.5 DA14A12.5 DA14A13.5 DA14A14.5 DA14A15.5 DA20A24.5 DA20A25.5 DA20A26.5 DA20A27.5 DA20A28.5 DD1.31 R1.2 R3.2 R4.2 R13.2 R15.2 R18.1 R28A11.2 R28A12.2 R28A13.2 R28A14.2 R28A15.2 R35A11.2 R35A12.2 R35A13.2 R35A14.2 R35A15.2 R83A24.2 R83A25.2 R83A26.2 R83A27.2 R83A28.2 U2A11.3 U2A11.4 U2A12.3 U2A12.4 U2A13.3 U2A13.4 U2A14.3 U2A14.4 U2A15.3 U2A15.4 U3A11.5 U3A12.5 U3A13.5 U3A14.5 U3A15.5 U11A24.5 U11A25.5 U11A26.5 U11A27.5 U11A28.5 XP2.2 XP2.4 XP2.6 XP2.8
  other v2: 56.475,81.75 57.175,81.75 57.875,81.75 58.575,81.75 56.475,82.55 57.175,82.55 57.875,82.55 58.575,82.55 56.475,83.35 57.175,83.35 57.875,83.35 58.575,83.35
AGND_CS: C6.2 C120A24.2 C120A25.2 C120A26.2 C120A27.2 C120A28.2 C121A24.1 C121A25.1 C121A26.1 C121A27.1 C121A28.1 R2.2 R80A24.2 R80A25.2 R80A26.2 R80A27.2 R80A28.2 U11A24.3 U11A24.4 U11A25.3 U11A25.4 U11A26.3 U11A26.4 U11A27.3 U11A27.4 U11A28.3 U11A28.4 XP3.2 XP3.4 XP3.6 XP3.8 XP3.10
CRASH_COL: DD1.128 R52.2
CRASH_IND: DD1.125 R49.2
CS1: R79A24.2 XP3.1
CS2: R79A25.2 XP3.3
CS3: R79A26.2 XP3.5
CS4: R79A27.2 XP3.7
CS5: R79A28.2 XP3.9
DRV1_ADC: C75A11.2 DA14A11.1 DD1.43 R39A11.1 | length 12.9
  Top Layer w0.5: C75A11.2@18.675,25.65 R39A11.1@20.125,25.65 ; DA14A11.1@21.55,25.325 21.55,25.525 21.425,25.65 R39A11.1@20.125,25.65 ; 25.625,20.3 21.882,20.3 20.125,22.057 R39A11.1@20.125,25.65
DRV1_AN_MOD: DD1.75 R25A11.1
DRV1_DIG_MOD: DD1.100 DD5A11.4
DRV1_ERR1: DD1.73 DD5A11.5
DRV1_ERR2: DD1.74 DD5A11.6
DRV1_ON: DD1.66 DD5A11.3
DRV1_SEL_AN: DA9A11.6 DD1.67
DRV2_ADC: C75A12.2 DA14A12.1 DD1.44 R39A12.1
DRV2_AN_MOD: DD1.96 R25A12.1
DRV2_DIG_MOD: DD1.101 DD5A12.4
DRV2_ERR1: DD1.78 DD5A12.5
DRV2_ERR2: DD1.79 DD5A12.6
DRV2_ON: DD1.76 DD5A12.3
DRV2_SEL_AN: DA9A12.6 DD1.77
DRV3_ADC: C75A13.2 DA14A13.1 DD1.45 R39A13.1
DRV3_AN_MOD: DD1.97 R25A13.1
DRV3_DIG_MOD: DD1.102 DD5A13.4
DRV3_ERR1: DD1.82 DD5A13.5
DRV3_ERR2: DD1.85 DD5A13.6
DRV3_ON: DD1.80 DD5A13.3
DRV3_SEL_AN: DA9A13.6 DD1.81
DRV4_ADC: C75A14.2 DA14A14.1 DD1.46 R39A14.1
DRV4_AN_MOD: DD1.98 R25A14.1
DRV4_DIG_MOD: DD1.103 DD5A14.4
DRV4_ERR1: DD1.88 DD5A14.5
DRV4_ERR2: DD1.89 DD5A14.6
DRV4_ON: DD1.86 DD5A14.3
DRV4_SEL_AN: DA9A14.6 DD1.87
DRV5_ADC: C75A15.2 DA14A15.1 DD1.47 R39A15.1
DRV5_AN_MOD: DD1.99 R25A15.1
DRV5_DIG_MOD: DD1.110 DD5A15.4
DRV5_ERR1: DD1.92 DD5A15.5
DRV5_ERR2: DD1.93 DD5A15.6
DRV5_ON: DD1.90 DD5A15.3
DRV5_SEL_AN: DA9A15.6 DD1.91
EMER_BUT: DD1.117 DD6.4 | length 10.9
  Top Layer w0.3: 207.691,35.771 207.702,35.771 207.906,35.567 207.978,35.495 ccw(c208.545,36.06) 209.11,35.494 209.3,35.684 cw(c209.495,35.489) 209.689,35.684 ; 208.05,36.13 208.259,35.921 208.333,35.847 ccw(c208.545,36.06) 208.757,35.847 208.947,36.037 cw(c209.495,35.489) 210.043,36.037 cw(c209.495,35.489) 210.044,34.943 209.853,34.751 ccw(c210.065,34.539) 209.853,34.327 210.25,33.93 210.409,33.771 210.803,33.771 ; 209.689,35.684 cw(c209.495,35.489) 209.689,35.295 209.499,35.105 ccw(c210.065,34.539) 209.499,33.974 209.896,33.577 210.202,33.271 210.303,33.271
EMIS_COL: DD1.127 R51.2
EMIS_IND: DD1.124 R48.2
ETH_CS: DD1.114 DD12.29
ETH_INT: DD1.116 DD12.47
ETH_MISO: DD1.112 DD12.33
ETH_MOSI: DD1.113 DD12.32
ETH_RST: DD1.115 DD12.48 R78.1 | length 2.7
  Top Layer w0.3: DD12.48@204.863,33.972 204.863,31.347 R78.1@204.888,31.322
ETH_SCLK: DD1.111 DD12.30
EXT1_AN_MOD: C125A24.2 DA9A11.1 DA20A24.1 DD1.36 R84A24.1
EXT2_AN_MOD: C125A25.2 DA9A12.1 DA20A25.1 DD1.37 R84A25.1
EXT3_AN_MOD: C125A26.2 DA9A13.1 DA20A26.1 DD1.40 R84A26.1
EXT4_AN_MOD: C125A27.2 DA9A14.1 DA20A27.1 DD1.41 R84A27.1
EXT5_AN_MOD: C125A28.2 DA9A15.1 DA20A28.1 DD1.42 R84A28.1
FIBER_IL: DD1.129 DD9.4
FLOW: DD1.4 DD10.6
GND: C3.2 C7.1 C8.2 C10.2 C11.2 C12.2 C13.2 C15.2 C16.1 C19.2 C20.2 C22.2 C23.1 C24.2 C25.2 C26.2 C27.2 C28.1 C29.1 C30.1 C31.2 C32.2 C33.1 C34.2 C35.2 C46A6.2 C46A7.2 C46A8.2 C46A9.2 C46A10.2 C47A6.2 C47A7.2 C47A8.2 C47A9.2 C47A10.2 C55A11.2 C55A12.2 C55A13.2 C55A14.2 C55A15.2 C56A11.2 C56A12.2 C56A13.2 C56A14.2 C56A15.2 C64A11.2 C64A12.2 C64A13.2 C64A14.2 C64A15.2 C76.2 C77.2 C78.2 C82.2 C83.2 C84.2 C85.2 C86.2 C87.2 C88.2 C89.2 C94.2 C95.2 C96.2 C97.2 C98.1 C103.2 C104.2 C105.2 C106.2 C107.2 C108.2 C109.2 C110.2 C111.2 C112.2 C113.2 C114.2 C115.2 C116.2 C117.2 C118.2 C119.2 DA1.7 DA3.1 DA4.2 DA10A11.5 DA10A12.5 DA10A13.5 DA10A14.5 DA10A15.5 DA15.5 DA16.5 DA19.2 DD1.16 DD1.38 DD1.51 DD1.61 DD1.83 DD1.94 DD1.107 DD1.120 DD1.130 DD2.4 DD3A6.4 DD3A7.4 DD3A8.4 DD3A9.4 DD3A10.4 DD4A6.5 DD4A7.5 DD4A8.5 DD4A9.5 DD4A10.5 DD5A11.2 DD5A11.8 DD5A12.2 DD5A12.8 DD5A13.2 DD5A13.8 DD5A14.2 DD5A14.8 DD5A15.2 DD5A15.8 DD6.3 DD7.3 DD8.3 DD9.3 DD10.5 DD10.7 DD11.1 DD11.8 DD12.1 DD12.7 DD12.10 DD12.16 DD12.23 DD12.25 DD12.26 DD12.27 DD12.28 DD12.46 GB1.1 R1.1 R3.1 R4.1 R5.2 R9.2 R42.2 R45.1 R46.1 R74.1 U1A6.2 U1A7.2 U1A8.2 U1A9.2 U1A10.2 U4.2 U5.2 U6.2 U7.3 U8.3 U9.3 U10.2 VD1.2 VD2.2 VD3.2 XP5.3 XP11.2 XP11.4 XP11.6 XP12.2 ZQ1.2 ZQ1.4 ZQ3.2 ZQ3.4 | length 10.2
  Top Layer w0.3: ZQ3.4@203.838,47.272 204.288,47.721 204.288,47.947 205.088,48.747 205.088,49.021 205.388,49.321 208.8,49.321 R74.1@208.838,49.284 ; C111.2@205.463,51.272 205.463,49.546 ZQ3.2@205.538,49.472
  Bottom Layer w0.3: DD5A11.2@15.925,20 15.925,21.95 C64A11.2@16.075,22.1
GND_24V: C1.2 C2.2 C57A11.2 C57A12.2 C57A13.2 C57A14.2 C57A15.2 C80.1 C81.2 C90.2 DA1.1 DA2.1 DA11A11.1 DA11A12.1 DA11A13.1 DA11A14.1 DA11A15.1 DA17.2 DA18.1 U4.3 U5.3 U6.3 U7.4 U8.4 U9.4 U10.3 XP4.2
GND_DRVA11: C59A11.2 C61A11.2 C63A11.1 C65A11.1 C66A11.2 C68A11.2 C69A11.2 C71A11.2 C72A11.2 DA11A11.3 DA12A11.2 DA13A11.5 DD5A11.9 DD5A11.15 R29A11.2 R34A11.1 R36A11.2 R37A11.2 U2A11.5 U3A11.3 U3A11.4 XP7A11.2 | length 16.1
  Top Layer w0.3: R37A11.2@21.925,14.85 R36A11.2@23.375,14.85
  Top Layer w1: 34.609,4.623 34.613,4.62 DA11A11.3@36.975,4.62
  GND Layer w1: 33.4,4.623 DA11A11.3@37,4.623
  Bottom Layer w0.3: DA12A11.2@15.6,5.025 15.6,6.65 C71A11.2@15.625,6.675 ; 15.625,4.3 DA12A11.2@15.625,5.025 ; DD5A11.15@15.925,10.4 15.925,8.575 C68A11.2@16.075,8.425
  Bottom Layer w1: C59A11.2@33.975,6.525 34.575,5.925 34.575,5.201 35.161,4.615 DA11A11.3@37,4.615
  other v1: 14.425,0.7 17,0.7 19.225,0.7 29.9,1.2 31.6,1.2 15.7,2 13.075,2.05 31.6,2.7 13.075,3.95 31.6,5.55 13.075,5.775 34.5,9.775 28.125,9.975 28.125,10.875 34.5,11.525 28.125,11.775 14.175,13.3 16.35,13.3 18.5,13.3 26.15,13.3 27.85,13.3 29.55,13.3 31.175,13.3 32.875,13.3 34.5,13.3
GND_DRVA12: C59A12.2 C61A12.2 C63A12.1 C65A12.1 C66A12.2 C68A12.2 C69A12.2 C71A12.2 C72A12.2 DA11A12.3 DA12A12.2 DA13A12.5 DD5A12.9 DD5A12.15 R29A12.2 R34A12.1 R36A12.2 R37A12.2 U2A12.5 U3A12.3 U3A12.4 XP7A12.2
GND_DRVA13: C59A13.2 C61A13.2 C63A13.1 C65A13.1 C66A13.2 C68A13.2 C69A13.2 C71A13.2 C72A13.2 DA11A13.3 DA12A13.2 DA13A13.5 DD5A13.9 DD5A13.15 R29A13.2 R34A13.1 R36A13.2 R37A13.2 U2A13.5 U3A13.3 U3A13.4 XP7A13.2
GND_DRVA14: C59A14.2 C61A14.2 C63A14.1 C65A14.1 C66A14.2 C68A14.2 C69A14.2 C71A14.2 C72A14.2 DA11A14.3 DA12A14.2 DA13A14.5 DD5A14.9 DD5A14.15 R29A14.2 R34A14.1 R36A14.2 R37A14.2 U2A14.5 U3A14.3 U3A14.4 XP7A14.2
GND_DRVA15: C59A15.2 C61A15.2 C63A15.1 C65A15.1 C66A15.2 C68A15.2 C69A15.2 C71A15.2 C72A15.2 DA11A15.3 DA12A15.2 DA13A15.5 DD5A15.9 DD5A15.15 R29A15.2 R34A15.1 R36A15.2 R37A15.2 U2A15.5 U3A15.3 U3A15.4 XP7A15.2
GND_FS: C91.2 C92.2 C93.2 DA18.3 DD10.4 R62.2 XP13.3
GND_PSA6: C48A6.2 C49A6.2 C50A6.2 C51A6.1 C52A6.2 C53A6.2 C54A6.2 DA7A6.5 DA8A6.2 DD3A6.5 DD3A6.7 DD4A6.4 XP6A6.2
GND_PSA7: C48A7.2 C49A7.2 C50A7.2 C51A7.1 C52A7.2 C53A7.2 C54A7.2 DA7A7.5 DA8A7.2 DD3A7.5 DD3A7.7 DD4A7.4 XP6A7.2
GND_PSA8: C48A8.2 C49A8.2 C50A8.2 C51A8.1 C52A8.2 C53A8.2 C54A8.2 DA7A8.5 DA8A8.2 DD3A8.5 DD3A8.7 DD4A8.4 XP6A8.2
GND_PSA9: C48A9.2 C49A9.2 C50A9.2 C51A9.1 C52A9.2 C53A9.2 C54A9.2 DA7A9.5 DA8A9.2 DD3A9.5 DD3A9.7 DD4A9.4 XP6A9.2
GND_PSA10: C48A10.2 C49A10.2 C50A10.2 C51A10.1 C52A10.2 C53A10.2 C54A10.2 DA7A10.5 DA8A10.2 DD3A10.5 DD3A10.7 DD4A10.4 XP6A10.2
GND_RS485: C99.1 C100.2 C101.2 C102.2 DD11.9 DD11.16 XP14.3
GUIDE_LAS: DD1.21 R40.1
KEY: DD1.118 DD7.4
LED1: DD1.53 R6.1
LED2: DD1.54 R7.1
LED3: DD1.55 R8.1
LNKn: DD12.17 R73.2 | length 25.2
  Top Layer w0.3: DD12.17@202.863,42.072 202.863,44.171 201.063,45.971 201.063,50.671 203.063,52.671 209.363,52.671 211.463,50.571 211.463,48.071 211.751,47.783 R73.2@212.588,47.783
MEM_CS: DD1.132 DD2.1
MEM_MISO: DD1.134 DD2.2
MEM_MOSI: DD1.135 DD2.5
MEM_SCLK: DD1.133 DD2.6
NetC4_1: C4.1 DA2.4 L2.1
NetC4_2: C4.2 DA2.3 R2.1
NetC9_1: C9.1 DA4.5
NetC9_2: C9.2 DA4.6
NetC22_1: C22.1 DD1.71
NetC31_1: C31.1 DD1.106
NetC36_1: C36.1 DA5.1 R11.2 R11.3
NetC42_1: C42.1 DA6.1 R17.2
NetC50A6_1: C50A6.1 DA7A6.3 R22A6.2
NetC50A7_1: C50A7.1 DA7A7.3 R22A7.2
NetC50A8_1: C50A8.1 DA7A8.3 R22A8.2
NetC50A9_1: C50A9.1 DA7A9.3 R22A9.2
NetC50A10_1: C50A10.1 DA7A10.3 R22A10.2
NetC55A11_1: C55A11.1 DA10A11.3 R25A11.2
NetC55A12_1: C55A12.1 DA10A12.3 R25A12.2
NetC55A13_1: C55A13.1 DA10A13.3 R25A13.2
NetC55A14_1: C55A14.1 DA10A14.3 R25A14.2
NetC55A15_1: C55A15.1 DA10A15.3 R25A15.2
NetC62A11_2: C62A11.2 R26A11.1 R28A11.1 U2A11.2 | length 6.9
  Top Layer w0.5: R26A11.1@29.284,25.638 30.734,25.638 32.184,25.638 32.275,25.547 U2A11.2@32.275,21.675
NetC62A12_2: C62A12.2 R26A12.1 R28A12.1 U2A12.2
NetC62A13_2: C62A13.2 R26A13.1 R28A13.1 U2A13.2
NetC62A14_2: C62A14.2 R26A14.1 R28A14.1 U2A14.2
NetC62A15_2: C62A15.2 R26A15.1 R28A15.1 U2A15.2
NetC63A11_2: C63A11.2 R27A11.1 R29A11.1 U3A11.2 | length 5.5
  Top Layer w0.5: U3A11.2@15.925,11.1 15.925,8.475 17.375,8.475 R27A11.1@18.825,8.475
NetC63A12_2: C63A12.2 R27A12.1 R29A12.1 U3A12.2
NetC63A13_2: C63A13.2 R27A13.1 R29A13.1 U3A13.2
NetC63A14_2: C63A14.2 R27A14.1 R29A14.1 U3A14.2
NetC63A15_2: C63A15.2 R27A15.1 R29A15.1 U3A15.2
NetC69A11_1: C69A11.1 DA13A11.3 R30A11.2 R34A11.2 | length 5.3
  Top Layer w0.5: R30A11.2@21.85,10.575 21.875,10.55 21.875,8.5 21.9,8.475 23.35,8.475 24.75,8.475 24.775,8.5 DA13A11.3@24.775,8.76
NetC69A12_1: C69A12.1 DA13A12.3 R30A12.2 R34A12.2
NetC69A13_1: C69A13.1 DA13A13.3 R30A13.2 R34A13.2
NetC69A14_1: C69A14.1 DA13A14.3 R30A14.2 R34A14.2
NetC69A15_1: C69A15.1 DA13A15.3 R30A15.2 R34A15.2
NetC70A11_1: C70A11.1 DA14A11.3 R31A11.2 R35A11.1 | length 5.2
  Top Layer w0.5: DA14A11.3@23.45,25.325 23.45,25.525 23.575,25.65 24.875,25.65 26.325,25.65 26.375,25.6 R31A11.2@26.375,23.55
NetC70A12_1: C70A12.1 DA14A12.3 R31A12.2 R35A12.1
NetC70A13_1: C70A13.1 DA14A13.3 R31A13.2 R35A13.1
NetC70A14_1: C70A14.1 DA14A14.3 R31A14.2 R35A14.1
NetC70A15_1: C70A15.1 DA14A15.3 R31A15.2 R35A15.1
NetC74A11_1: C74A11.1 DA13A11.4 R32A11.2 R38A11.1 | length 7.2
  Top Layer w0.3: DA13A11.4@24.775,6.61 24.775,6.935 24.9,7.06 25.11,7.06 25.75,7.7 27.094,7.7 27.569,7.225 27.825,7.225 R38A11.1@28.1,6.95
  Top Layer w0.5: R38A11.1@28.1,6.95 29.55,6.95 R32A11.2@31,6.95
NetC74A11_2: C74A11.2 DA13A11.1 R38A11.2 XP7A11.5 | length 15.4
  Top Layer w0.3: XP7A11.5@25.125,3.625 26.125,2.625 v3(29.55,2.625)
  Top Layer w0.5: DA13A11.1@26.675,8.76 26.675,8.625 26.8,8.5 28.1,8.5 29.55,8.5 v1(29.55,9.3)
  Bottom Layer w0.5: v3(29.55,2.625) v1(29.55,9.3)
NetC74A12_1: C74A12.1 DA13A12.4 R32A12.2 R38A12.1
NetC74A12_2: C74A12.2 DA13A12.1 R38A12.2 XP7A12.5
NetC74A13_1: C74A13.1 DA13A13.4 R32A13.2 R38A13.1
NetC74A13_2: C74A13.2 DA13A13.1 R38A13.2 XP7A13.5
NetC74A14_1: C74A14.1 DA13A14.4 R32A14.2 R38A14.1
NetC74A14_2: C74A14.2 DA13A14.1 R38A14.2 XP7A14.5
NetC74A15_1: C74A15.1 DA13A15.4 R32A15.2 R38A15.1
NetC74A15_2: C74A15.2 DA13A15.1 R38A15.2 XP7A15.5
NetC75A11_1: C75A11.1 DA14A11.4 R33A11.2 R39A11.2 | length 7.5
  Top Layer w0.5: R33A11.2@17.223,27.188 C75A11.1@18.673,27.188 ; C75A11.1@18.685,27.2 R39A11.2@20.175,27.2 ; R39A11.2@20.125,27.2 R39A11.2@20.175,27.2 ; DA14A11.4@23.45,27.475 23.425,27.45 23.425,26.718 23.132,26.425 20.9,26.425 20.35,26.975 20.35,27.025 R39A11.2@20.175,27.2
NetC75A12_1: C75A12.1 DA14A12.4 R33A12.2 R39A12.2
NetC75A13_1: C75A13.1 DA14A13.4 R33A13.2 R39A13.2
NetC75A14_1: C75A14.1 DA14A14.4 R33A14.2 R39A14.2
NetC75A15_1: C75A15.1 DA14A15.4 R33A15.2 R39A15.2
NetC76_1: C76.1 DA15.3 R40.2
NetC79_1: C79.1 DA16.1 R43.1
NetC79_2: C79.2 DA16.4 R44.1
NetC82_1: C82.1 DD6.2 R53.2 R56.1
NetC83_1: C83.1 DD7.2 R54.2 R57.1
NetC84_1: C84.1 DD8.2 R55.2 R58.1
NetC88_1: C88.1 DD9.2 R60.2 R61.1
NetC99_2: C99.2 C100.1 C101.1 C102.1 DD11.10 DD11.15
NetC104_1: C104.1 XS1.13 XS1.14 | length 20.4
  Top Layer w0.3: XS1.13@222.063,29.504 223.463,30.904 223.463,43.944 XS1.14@222.063,45.344
  Bottom Layer w0.5: XS1.14@222.063,45.344 C104.1@222.063,48.771
NetC106_1: C106.1 R64.2 R65.2 | length 8.1
  Top Layer w0.3: v1(211.563,31.371) 212.566,31.371 R64.2@212.588,31.35 ; v1(211.563,35.871) 212.566,35.871 R65.2@212.588,35.85 C106.1@212.588,37.349
  Bottom Layer w0.3: v1(211.563,31.371) v1(211.563,35.871)
NetC107_1: C107.1 R66.2 R67.2 | length 8.3
  Top Layer w0.3: v1(211.463,39.571) 212.563,39.571 R66.2@212.588,39.597 ; v1(211.463,44.071) 212.563,44.071 R67.2@212.588,44.097 C107.1@212.588,45.596
  Bottom Layer w0.3: v1(211.463,39.571) v1(211.463,44.071)
NetC111_1: C111.1 R77.2 ZQ3.3 | length 3.6
  Top Layer w0.3: R77.2@202.163,49.322 203.688,49.321 ZQ3.3@203.838,49.472 203.913,49.546 C111.1@203.913,51.272
NetC121A24_2: C121A24.2 R79A24.1 R80A24.1 U11A24.2
NetC121A25_2: C121A25.2 R79A25.1 R80A25.1 U11A25.2
NetC121A26_2: C121A26.2 R79A26.1 R80A26.1 U11A26.2
NetC121A27_2: C121A27.2 R79A27.1 R80A27.1 U11A27.2
NetC121A28_2: C121A28.2 R79A28.1 R80A28.1 U11A28.2
NetC123A24_1: C123A24.1 DA20A24.3 R81A24.2 R83A24.1
NetC123A25_1: C123A25.1 DA20A25.3 R81A25.2 R83A25.1
NetC123A26_1: C123A26.1 DA20A26.3 R81A26.2 R83A26.1
NetC123A27_1: C123A27.1 DA20A27.3 R81A27.2 R83A27.1
NetC123A28_1: C123A28.1 DA20A28.3 R81A28.2 R83A28.1
NetC125A24_1: C125A24.1 DA20A24.4 R82A24.2 R84A24.2
NetC125A25_1: C125A25.1 DA20A25.4 R82A25.2 R84A25.2
NetC125A26_1: C125A26.1 DA20A26.4 R82A26.2 R84A26.2
NetC125A27_1: C125A27.1 DA20A27.4 R82A27.2 R84A27.2
NetC125A28_1: C125A28.1 DA20A28.4 R82A28.2 R84A28.2
NetDA5_6: DA5.6 R14.1
NetDA6_3: DA6.3 R18.2
NetDA7A6_1: DA7A6.1 DA7A6.4 XP6A6.6
NetDA7A7_1: DA7A7.1 DA7A7.4 XP6A7.6
NetDA7A8_1: DA7A8.1 DA7A8.4 XP6A8.6
NetDA7A9_1: DA7A9.1 DA7A9.4 XP6A9.6
NetDA7A10_1: DA7A10.1 DA7A10.4 XP6A10.6
NetDA9A11_3: DA9A11.3 DA10A11.1 DA10A11.4
NetDA9A11_4: DA9A11.4 R26A11.2
NetDA9A12_3: DA9A12.3 DA10A12.1 DA10A12.4
NetDA9A12_4: DA9A12.4 R26A12.2
NetDA9A13_3: DA9A13.3 DA10A13.1 DA10A13.4
NetDA9A13_4: DA9A13.4 R26A13.2
NetDA9A14_3: DA9A14.3 DA10A14.1 DA10A14.4
NetDA9A14_4: DA9A14.4 R26A14.2
NetDA9A15_3: DA9A15.3 DA10A15.1 DA10A15.4
NetDA9A15_4: DA9A15.4 R26A15.2
NetDA15_1: DA15.1 DA15.4 R41.1
NetDA16_3: DA16.3 R41.2 R42.1
NetDD1_48: DD1.48 R5.1
NetDD1_138: DD1.138 R9.1
NetDD1_143: DD1.143 R10.1
NetDD3A6_6: DD3A6.6 R22A6.1
NetDD3A7_6: DD3A7.6 R22A7.1
NetDD3A8_6: DD3A8.6 R22A8.1
NetDD3A9_6: DD3A9.6 R22A9.1
NetDD3A10_6: DD3A10.6 R22A10.1
NetDD4A6_2: DD4A6.2 R23A6.2 XP6A6.4
NetDD4A6_3: DD4A6.3 R24A6.2 XP6A6.5
NetDD4A7_2: DD4A7.2 R23A7.2 XP6A7.4
NetDD4A7_3: DD4A7.3 R24A7.2 XP6A7.5
NetDD4A8_2: DD4A8.2 R23A8.2 XP6A8.4
NetDD4A8_3: DD4A8.3 R24A8.2 XP6A8.5
NetDD4A9_2: DD4A9.2 R23A9.2 XP6A9.4
NetDD4A9_3: DD4A9.3 R24A9.2 XP6A9.5
NetDD4A10_2: DD4A10.2 R23A10.2 XP6A10.4
NetDD4A10_3: DD4A10.3 R24A10.2 XP6A10.5
NetDD5A11_11: DD5A11.11 R36A11.1 XP7A11.8 | length 20.1
  Top Layer w0.5: R36A11.1@23.35,13.3 v1(24.375,13.3)
  Bottom Layer w0.3: v1(24.375,13.3) 22.274,13.3 21.015,12.041 21.015,8.71 21.269,8.456 23.567,8.456 28.025,3.998 28.025,3.981 28.225,3.781 28.225,2.725 XP7A11.8@27.125,1.625
NetDD5A11_12: DD5A11.12 R37A11.1 XP7A11.6 | length 17.5
  Top Layer w0.5: v1(20.875,13.3) R37A11.1@21.9,13.3
  Bottom Layer w0.3: v1(20.875,13.3) 19.745,12.17 19.745,10.42 19.725,10.4 19.725,8.425 20.45,7.7 22.558,7.7 26.125,4.133 26.125,2.625 XP7A11.6@25.125,1.625
NetDD5A11_13: DD5A11.13 XP7A11.4 | length 12.6
  Bottom Layer w0.3: DD5A11.13@18.476,10.299 18.476,7.999 19.35,7.125 21.35,7.125 24.125,4.35 24.125,2.625 XP7A11.4@23.125,1.625
NetDD5A11_14: DD5A11.14 XP7A11.3 | length 10.4
  Bottom Layer w0.3: DD5A11.14@17.205,10.4 17.205,7.47 18.425,6.25 20.5,6.25 XP7A11.3@23.125,3.625
NetDD5A12_11: DD5A12.11 R36A12.1 XP7A12.8
NetDD5A12_12: DD5A12.12 R37A12.1 XP7A12.6
NetDD5A12_13: DD5A12.13 XP7A12.4
NetDD5A12_14: DD5A12.14 XP7A12.3
NetDD5A13_11: DD5A13.11 R36A13.1 XP7A13.8
NetDD5A13_12: DD5A13.12 R37A13.1 XP7A13.6
NetDD5A13_13: DD5A13.13 XP7A13.4
NetDD5A13_14: DD5A13.14 XP7A13.3
NetDD5A14_11: DD5A14.11 R36A14.1 XP7A14.8
NetDD5A14_12: DD5A14.12 R37A14.1 XP7A14.6
NetDD5A14_13: DD5A14.13 XP7A14.4
NetDD5A14_14: DD5A14.14 XP7A14.3
NetDD5A15_11: DD5A15.11 R36A15.1 XP7A15.8
NetDD5A15_12: DD5A15.12 R37A15.1 XP7A15.6
NetDD5A15_13: DD5A15.13 XP7A15.4
NetDD5A15_14: DD5A15.14 XP7A15.3
NetDD10_2: DD10.2 R62.1 XP13.1
NetDD11_11: DD11.11 DD11.14 R63.1 XP14.1
NetDD11_12: DD11.12 DD11.13 R63.2 XP14.2
NetDD12_9: DD12.9 R76.2 | length 10.2
  Top Layer w0.3: DD12.9@206.163,39.272 206.913,39.271 207.208,39.271 208.163,40.226 208.163,44.071 208.914,44.822 R76.2@208.914,47.697
NetR6_2: R6.2 VD1.1
NetR7_2: R7.2 VD2.1
NetR8_2: R8.2 VD3.1
NetR14_2: R14.2 R15.1 R16.1 R17.1
NetR21A6_2: R21A6.2 U1A6.1
NetR21A7_2: R21A7.2 U1A7.1
NetR21A8_2: R21A8.2 U1A8.1
NetR21A9_2: R21A9.2 U1A9.1
NetR21A10_2: R21A10.2 U1A10.1
NetR27A11_2: R27A11.2 XP7A11.7 | length 10.2
  Top Layer w0.5: R27A11.2@18.925,6.925 18.925,5.85 19.84,4.935 25.815,4.935 XP7A11.7@27.125,3.625
NetR27A12_2: R27A12.2 XP7A12.7
NetR27A13_2: R27A13.2 XP7A13.7
NetR27A14_2: R27A14.2 XP7A14.7
NetR27A15_2: R27A15.2 XP7A15.7
NetR30A11_1: R30A11.1 U2A11.7 | length 11.4
  Top Layer w0.3: R30A11.1@23.4,10.575 23.675,10.85 23.675,11.179 25.032,12.536 32.045,12.536 32.275,12.306 U2A11.7@32.275,10.925
NetR30A12_1: R30A12.1 U2A12.7
NetR30A13_1: R30A13.1 U2A13.7
NetR30A14_1: R30A14.1 U2A14.7
NetR30A15_1: R30A15.1 U2A15.7
NetR31A11_1: R31A11.1 U3A11.7 | length 18.3
  Top Layer w0.3: v1(13.525,21.775) 13.525,20.404 13.762,20.167 15.759,20.167 15.935,20.343 U3A11.7@15.935,21.675
  Top Layer w0.5: v1@24.825,21.795 R31A11.1@24.825,23.55
  Power Layer w0.3: v1(13.525,21.775) v1(24.825,21.775)
NetR31A12_1: R31A12.1 U3A12.7
NetR31A13_1: R31A13.1 U3A13.7
NetR31A14_1: R31A14.1 U3A14.7
NetR31A15_1: R31A15.1 U3A15.7
NetR32A11_1: R32A11.1 U2A11.6 | length 2.4
  Top Layer w0.5: R32A11.1@31,8.5 U2A11.6@31,10.925
NetR32A12_1: R32A12.1 U2A12.6
NetR32A13_1: R32A13.1 U2A13.6
NetR32A14_1: R32A14.1 U2A14.6
NetR32A15_1: R32A15.1 U2A15.6
NetR33A11_1: R33A11.1 U3A11.6 | length 4
  Top Layer w0.3: U3A11.6@17.223,21.675 R33A11.1@17.223,25.638
NetR33A12_1: R33A12.1 U3A12.6
NetR33A13_1: R33A13.1 U3A13.6
NetR33A14_1: R33A14.1 U3A14.6
NetR33A15_1: R33A15.1 U3A15.6
NetR43_2: R43.2 R45.2 VT1.1
NetR44_2: R44.2 R46.2 VT1.2
NetR47_1: R47.1 U4.1
NetR48_1: R48.1 U5.1
NetR49_1: R49.1 U6.1
NetR50_1: R50.1 U7.1
NetR51_1: R51.1 U8.1
NetR52_1: R52.1 U9.1
NetR53_1: R53.1 XP11.1
NetR54_1: R54.1 XP11.3
NetR55_1: R55.1 XP11.5
NetR59_1: R59.1 U10.1
NetR60_1: R60.1 XP12.1
NetR70_1: R70.1 XS1.10 | length 31.2
  Top Layer w0.3: R70.1@214.138,49.284 222.451,49.283 225.563,46.171 230.063,46.171 231.763,44.471 231.763,35.311 XS1.10@230.063,33.611
NetR73_1: R73.1 XS1.12 | length 17.6
  Top Layer w0.3: R73.1@214.138,47.783 222.81,47.783 225.19,45.404 228.401,45.404 XS1.12@230.063,43.741
NetR74_2: R74.2 R76.1 | length 1.5
  Top Layer w0.3: R76.1@210.388,47.784 R74.2@210.388,49.284
NetR81A24_1: R81A24.1 U11A24.7
NetR81A25_1: R81A25.1 U11A25.7
NetR81A26_1: R81A26.1 U11A26.7
NetR81A27_1: R81A27.1 U11A27.7
NetR81A28_1: R81A28.1 U11A28.7
NetR82A24_1: R82A24.1 U11A24.6
NetR82A25_1: R82A25.1 U11A25.6
NetR82A26_1: R82A26.1 U11A26.6
NetR82A27_1: R82A27.1 U11A27.6
NetR82A28_1: R82A28.1 U11A28.6
NetU1A6_3: U1A6.3 XP6A6.3
NetU1A7_3: U1A7.3 XP6A7.3
NetU1A8_3: U1A8.3 XP6A8.3
NetU1A9_3: U1A9.3 XP6A9.3
NetU1A10_3: U1A10.3 XP6A10.3
NetU4_4: U4.4 XP9.2
NetU5_4: U5.4 XP9.4
NetU6_4: U6.4 XP9.6
NetU7_6: U7.6 XP10.2
NetU8_6: U8.6 XP10.4
NetU9_6: U9.6 XP10.6
NetU10_4: U10.4 XP11.8
NetVT1_3: VT1.3 XP8.2
NRST: C27.1 DD1.25 XP5.5
OSC32_IN: C20.1 DD1.8 ZQ2.2
OSC32_OUT: C13.1 DD1.9 ZQ2.1
OSC_IN: C19.1 DD1.23 ZQ1.3
OSC_OUT: C12.1 DD1.24 ZQ1.1
PD1_A: R12.2 R13.1 XP1.2
PD1_ADC: C41.1 DD1.27 R16.2
PD1_C: C36.2 DA5.2 R11.1 XP1.1
PD1_ERR: DA6.5 DD1.26
POWER_COL: DD1.126 R50.2
POWER_IND: DD1.123 R47.2
PS1_ERR1: DD1.142 DD4A6.7
PS1_ERR2: DD1.1 DD4A6.6
PS1_ON: DD1.141 R21A6.1
PS1_PV: DD1.136 DD3A6.2
PS2_ERR1: DD1.3 DD4A7.7
PS2_ERR2: DD1.5 DD4A7.6
PS2_ON: DD1.2 R21A7.1
PS2_PV: DD1.137 DD3A7.2
PS3_ERR1: DD1.10 DD4A8.7
PS3_ERR2: DD1.11 DD4A8.6
PS3_ON: DD1.7 R21A8.1
PS3_PV: DD1.139 DD3A8.2
PS4_ERR1: DD1.13 DD4A9.7
PS4_ERR2: DD1.14 DD4A9.6
PS4_ON: DD1.12 R21A9.1
PS4_PV: DD1.140 DD3A9.2
PS5_ERR1: DD1.18 DD4A10.7
PS5_ERR2: DD1.19 DD4A10.6
PS5_ON: DD1.15 R21A10.1
PS5_PV: DD1.20 DD3A10.2
RD_N: DA19.4 R66.1 R69.2 XS1.6 | length 35.9
  Top Layer w0.3: R69.2@214.138,41.097 214.138,41.146 214.561,41.569 215.243,41.569 216.592,42.919 217.498,42.919 218.113,42.304 218.113,41.377 218.053,41.317 218.053,39.965 218.213,39.805 218.213,38.853 217.67,38.309 217.421,38.309 217.245,38.485 217.245,39.147 XS1.6@217.063,39.329
  Top Layer w0.381: R66.1@214.138,39.597 R69.2@214.138,41.097
  Bottom Layer w0.3: DA19.4@215.013,26.846 215.138,26.721 215.636,26.721 215.811,26.546 215.811,25.918 216.312,25.417 218.509,25.417 220.263,27.171 220.263,30.788 221.755,32.28 221.755,32.334 221.898,32.477 221.898,37.738 221.3,38.336 220.811,38.336 219.818,39.329 XS1.6@217.063,39.329
RD_P: DA19.3 R67.1 R72.2 XS1.4 | length 35
  Top Layer w0.3: R67.1@214.138,44.097 R72.2@214.138,42.597 214.138,42.546 214.561,42.123 215.013,42.123 216.363,43.473 217.728,43.473 218.667,42.533 218.667,41.148 218.553,41.034 218.553,40.172 218.713,40.012 218.713,38.645 217.877,37.809 217.421,37.809 217.245,37.633 217.245,36.971 XS1.4@217.063,36.789
  Bottom Layer w0.3: XS1.4@217.063,36.789 219.818,36.789 220.849,37.82 221.087,37.82 221.382,37.524 221.382,32.69 219.709,31.017 219.709,27.401 218.28,25.971 216.541,25.971 216.365,26.147 216.365,26.546 216.541,26.721 217.038,26.721 DA19.3@217.163,26.846
RE/DE: DD1.68 DD11.4 DD11.5
Rx485: DD1.70 DD11.3
RXI_N: DD12.5 R69.1 | length 9.4
  Top Layer w0.3: DD12.5@206.163,37.272 207.894,37.271 209.663,39.041 209.663,40.864 210.328,41.529 211.106,41.529 211.538,41.096 R69.1@212.588,41.097
RXI_P: DD12.6 R72.1 | length 9.5
  Top Layer w0.3: DD12.6@206.163,37.772 207.687,37.771 209.163,39.248 209.163,41.071 210.121,42.029 211.121,42.029 211.688,42.596 R72.1@212.588,42.597
START_BUT: DD1.119 DD8.4
START_IND: DD1.122 R59.2
SWCLK: DD1.109 XP5.2
SWDIO: DD1.105 XP5.4
T1: R19A2.2 R20A2.1 XP2.1
T1_ADC: C45A2.1 DD1.28 R20A2.2
T2: R19A3.2 R20A3.1 XP2.3
T2_ADC: C45A3.1 DD1.29 R20A3.2
T3: R19A4.2 R20A4.1 XP2.5
T3_ADC: C45A4.1 DD1.34 R20A4.2
T4: R19A5.2 R20A5.1 XP2.7
T4_ADC: C45A5.1 DD1.35 R20A5.2
TD_N: DA19.6 R64.1 R68.2 XS1.3 | length 25.1
  Top Layer w0.3: R68.2@214.138,33.078 214.318,33.078 214.561,33.322 215.06,33.322 215.364,33.018 215.364,32.17 216.417,31.117 220.909,31.117 221.863,32.071 221.863,33.755 221.092,34.526 219.988,34.526 219.812,34.702 219.812,35.31 XS1.3@219.603,35.519
  Top Layer w0.381: R64.1@214.138,31.35 R68.2@214.138,32.849